# Altium PCB MicrobitQwiic 138.PcbDoc
Units mm, origin at the board's own origin, x right, y up, seen from the top; angles counter-clockwise.
Board outline 17.58 x 16.07 mm, 2 copper layers (Top Layer, Bottom Layer), stack 1.525 mm thick; 6 components, 4 nets, 16 pads, 2 vias.
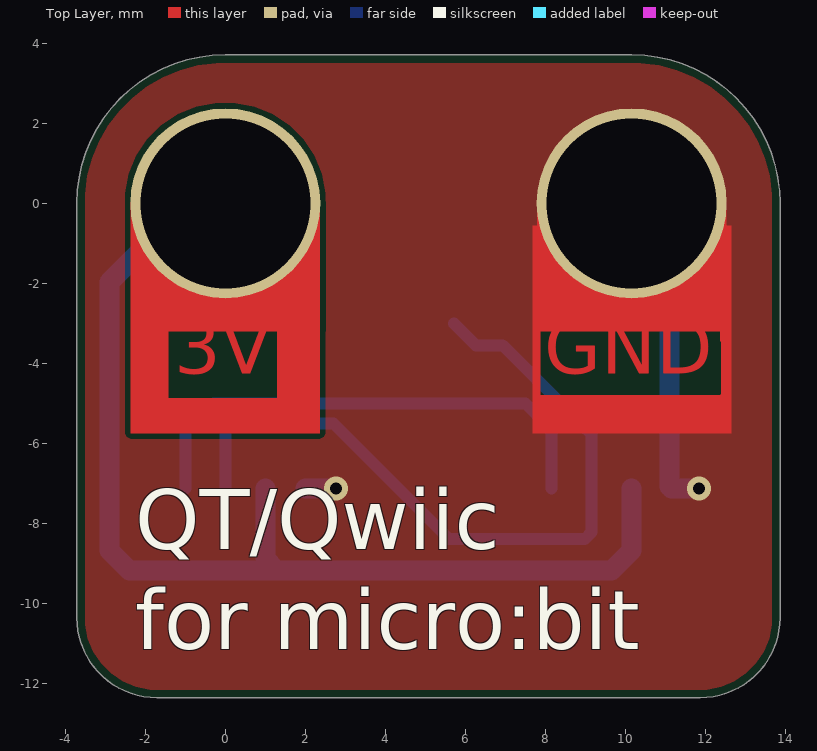
[diagram p0: Top Layer view]
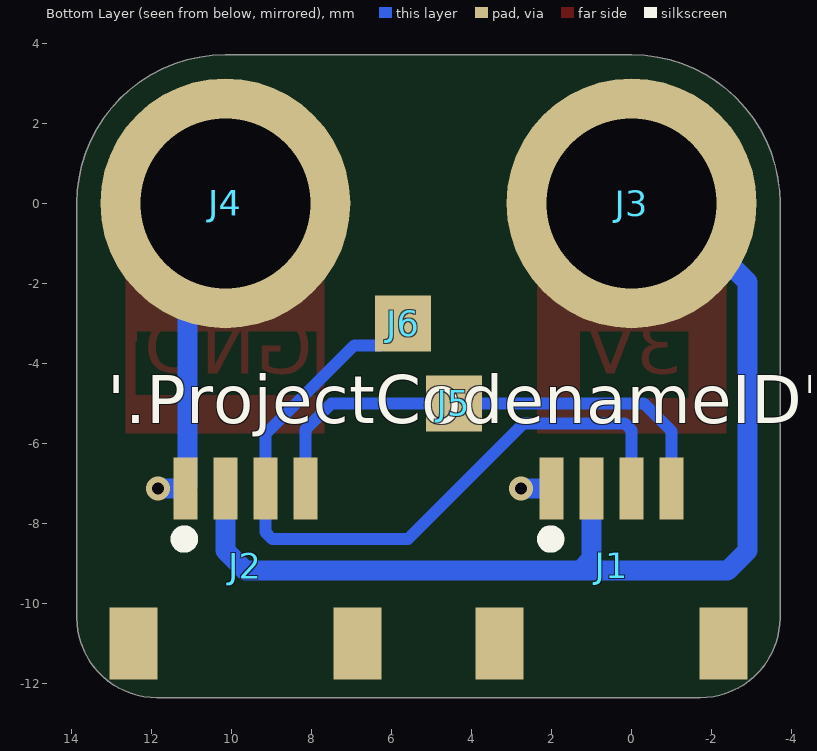
[diagram p1: Bottom Layer view, seen from below]

## Layer stack, top to bottom
Top Solder: solder mask 0.0102, Solder Resist, Dk 3.5
Top Layer: signal copper 0.0356
Dielectric 1: core 1.454, FR-4, Dk 4.2
Bottom Layer: signal copper 0.0356
Bottom Solder: solder mask 0.0102, Solder Resist, Dk 3.5

## Board outline
-3.71,-10.36 ccw(c-1.71,-10.36) -1.71,-12.36 11.87,-12.36 ccw(c11.87,-10.36) 13.87,-10.36 13.87,0 ccw(c10.16,0) 10.16,3.71 0.003,3.71 0,3.71 ccw(c0,0) -3.71,0

## Design rules (kind name [scope] priority, off if disabled: settings)
AssemblyTestPointUsage [All] p1: valid=2
BoardOutlineClearance [All] p1: gap=0.3 ignorepadtopadclearanceinfootprint=FALSE except(0: Arc-OutlineEdge Arc-SplitContinuation Track-OutlineEdge Track-SplitContinuation SMDPad-OutlineEdge SMDPad-SplitContinuation THPad-OutlineEdge THPad-SplitContinuation Via-OutlineEdge Via-SplitContinuation Fill-SplitContinuation Poly-SplitContinuation Region-OutlineEdge Region-SplitContinuation Text-OutlineEdge Text-SplitContinuation; 0.2: Fill-OutlineEdge Poly-OutlineEdge Region-CavityEdge Region-CutoutEdge Region-SplitBarrior Text-CavityEdge Text-CutoutEdge Text-SplitBarrior)
Clearance [All] p1: gap=0.13 ignorepadtopadclearanceinfootprint=FALSE
ComponentClearance MH5.0KeepoutaAreaClearance [InComponent('MH1') or InComponent('MH2')  or InComponent('MH3') or InComponent('MH4') vs InComponent('D6') or InComponent('D7') or InComponent('D8') or InComponent('D9') or InComponent('D10') or InComponent('D11') or InComponent('D12') or InComponent('D13') or InComponent('C6') or InComponent('C7') or InComponent('C8')  or  InComponent('C9') or  InComponent('C12')] p1: gap=0 collisioncheckmode=3 verticalgap=0 showdistances=FALSE
ComponentClearance [All] p2: gap=0.2 collisioncheckmode=3 verticalgap=0.2 showdistances=FALSE
DiffPairsRouting [All] p1: maxlimit=2 minlimit=0.15 mostfreqgap=0.15 toplayer_minwidth=0.15 toplayer_maxwidth=2 toplayer_prefwidth=0.15 bottomlayer_minwidth=0.15 bottomlayer_maxwidth=2 bottomlayer_prefwidth=0.15 maxuncoupledlength=25
FabricationTestPointUsage [All] p1: valid=2 allowmultiple=FALSE
HoleSize [All] p1: absolutevalues=TRUE maxlimit=5 minlimit=0.15 maxpercent=80.000 minpercent=20.000
HoleToHoleClearance [All] p1: gap=0.2 allowstackedmicrovias=TRUE
MinimumSolderMaskSliver [All] p1: minsoldermaskwidth=0.005
PlaneClearance [All] p1: clearance=0.2
PlaneConnect [All] p1: planeconnectstyle=Relief reliefexpansion=0.5 reliefentries=4 reliefconductorwidth=0.2 reliefairgap=0.3
PolygonConnect [All] p1: connectstyle=Direct reliefconductorwidth=0.2 reliefentries=4 polygonreliefangle="90 Angle" airgapwidth=0.2
RoutingVias RoutingVias_Power [InNetClass('Power')] p1: holewidth=0.4 width=0.8 viastyle="Through Hole" minholewidth=0.3 minwidth=0.6 maxholewidth=0.4 maxwidth=1
RoutingVias [All] p2: holewidth=0.3 width=0.6 viastyle="Through Hole" minholewidth=0.3 minwidth=0.6 maxholewidth=0.3 maxwidth=0.8
SilkToSilkClearance [All] p1: silktosilkclearance=0.001
SilkToSolderMaskClearance [IsPad] p1: minsilkscreentomaskgap=0.05 clearancetoexposedcopper=TRUE
SolderMaskExpansion [All] p1: expansion=0.075 istentingtop=FALSE
UnRoutedNet [All] p1: checkbadconnections=TRUE
ViasUnderSMD [not ( HasFootprint('JACDAC_EDGE_CONNECTOR_NO_TRACES') or HasFootprint('JACDAC_EDGE_CONNECTOR_NO_TRACES_CABLE_GUIDE') )] p1: allowed=FALSE
Width Width_Power [InNetClass('Power')] p1: maxlimit=1 minlimit=0.2 preferedwidth=0.5
Width [All] p2: maxlimit=1 minlimit=0.13 preferedwidth=0.13 minimp=50.000000 maximp=50.000000 favimp=50.000000
18 further rules are at their usual default settings.

## Classes and differential pairs
component class "MicrobitQwiic 138": J1 J2 J3 J5 J6

## Components (designator, comment, footprint, x,y, rotation, side; value= is the part's Value field where it differs from the comment)
J1 "SM04B-SRSS-TB(LF)(SN)" SM04B-SRSS-TB(LF)(SN) 0.5,-7.125 r180 bottom
J2 "SM04B-SRSS-TB(LF)(SN)" SM04B-SRSS-TB(LF)(SN) 9.66,-7.125 r180 bottom
J3 "SMTSO-M3-1mm" "smtso M3x1mm" 0,0 r180 bottom
J4 "SMTSO-M3-1mm" "smtso M3x1mm" 10.16,0 r180 bottom
J5 "Pogo" ALPS-SCTA2A0100 4.445,-5 r180 bottom
J6 "Pogo" ALPS-SCTA2A0100 5.715,-3 r180 bottom

## Footprints (in the part's own frame and the unit in brackets; to place one, negate y for a bottom-side part, rotate by r counter-clockwise, add the part's x,y. Pads: shape width x height; smd on the part's side, far side on the other; paste and mask are expansions set on the pad)
ALPS-SCTA2A0100 [mm] "pogo pin 0.8-1.2mm"
  rect 1.4x1.4 smd paste-0.2: 1(0,0)
  body extent -0.7,-0.7 0.7,0.7, height 1.4
SM04B-SRSS-TB(LF)(SN) [mm] "Connector Header Surface Mount, Right Angle 4 position 0.039\" (1.00mm)"
  rect 0.6x1.55 smd: 1(-1.5,0) 2(-0.5,0) 3(0.5,0) 4(1.5,0)
  rect 1.2x1.8 smd: M1(-2.8,-3.875) M2(2.8,-3.875)
  silkscreen extent -1.67,-1.41 -1.38,-1.13, body extent -3,-4.53 3,0.42, height 2.86
"smtso M3x1mm" [mm] "generic M3x1mm SMTSO"
  round 6.25 / inner round 6.25 / far side round 4.75 hole 4.25: 1(0,0)
  body extent -2.77,-2.78 2.77,2.78, height 1

## Part data
J1 J2: "CONN HEADER SMD R/A 4POS 1MM", Color=Natural, Contact Resistance=40mR, Housing Color=Beige, Manufacturer=JST, Max Current Rating=1A, Max Operating Temperature=85°C, Max Voltage Rating (AC)=50V, Min Operating Temperature=-25°C, Supplier Part Number 1=455-1804-1-ND, Category=Connectors, ComponentLink1Description="Online datasheet", ComponentLink1URL=https://datasheet.ciiva.com/26894/getdatasheetpartid-499363-26894945.pdf?src-supplier=Verical, ComponentLink2Description="STEMMA QT info", ComponentLink2URL=https://learn.adafruit.com/introducing-adafruit-stemma-qt/what-is-stemma-qt, ComponentLink3Description="Qwiic info", ComponentLink3URL=https://www.sparkfun.com/qwiic, Connector Type="Male Pin", Contact Material="Copper Alloy", Contact Plating=Tin,Copper, Depth=4.95mm, Housing Material=Polyamide, Lead Free="Lead Free", Length=6mm, Manufacturer 1=JST, Manufacturer Part Number=SM04B-SRSS-TB(LF)(SN), Manufacturer Part Number 1=SM04B-SRSS-TB(LF)(SN), Max Voltage Rating (DC)=50V, Mount="Surface Mount", Number of Contacts=4, Number of Positions=4, Number of Rows=1, Orientation="Right Angle", Packaging="Tape and Reel", Pitch=0.039inch, RoHS=Yes, Supplier 1=Digi-Key, Supplier 2=Farnell, Supplier 3="Future Electronics", Supplier 4=Newark, Supplier Part Number 2=1830839, Supplier Part Number 3=4517173, Supplier Part Number 4=87R0314, Termination=Solder
J3 J4: Supplier Part Number 1=C2916331, Diameter=M3, Standoff Height=1mm, Supplier 1=LCSC
J5 J6: library part SCTA2A0100, "PCB 3A Spring contct SMT 1.4x1.4x1.2mm, working height 0.8-1.2mm", Manufacturer="Alps Electric", Supplier Part Number 1=3261853, Category=Connectors, ComponentLink3Description="Alps webpage", ComponentLink3URL=https://tech.alpsalpine.com/e/products/detail/SCTA2A0100/, Manufacturer 1="Alps Electric", Manufacturer Part Number=SCTA2A0100, Manufacturer Part Number 1=SCTA2A0100, Pricing 1="10=0.12200, 50=0.10400, 100=0.10100, 500=0.07680 (GBP)", RoHS=No, Stock 1=6260, Supplier 1=Farnell, Supplier 2=Mouser, Supplier 3=LCSC, Supplier Part Number 2=688-SCTA2A0100, Supplier Part Number 3=C351180, Working Height=1.0mm

## Via types
v1: diameter 0.6, hole 0.3, Top Layer to Bottom Layer, tented both sides, 2 vias

## Nets (pads, with @x,y where several pads share a name; then routed paths per layer and width w, separated by ;. In a path a pad name is that pad's centre, name@x,y a point inside that pad or via, vN(x,y) a via of type N, cw(c..) or ccw(c..) an arc to the next point about the centre after c; other vN are vias at no path point)
GND: J1.1 J2.1 J4.1 | length 9
  Bottom Layer w0.5: J1.1 v1(2.768,-7.125) ; J4.1 11.11,-0.95 11.11,-7.075 J2.1 v1(11.839,-7.125)
SCL: J1.4 J2.4 J5.1 | length 12.6
  Bottom Layer w0.3: J1.4 -1,-5.7 -0.3,-5 J5.1 7.5,-5 8.16,-5.66 J2.4
SDA: J1.3 J2.3 J6.1 | length 19
  Bottom Layer w0.3: J1.3 0,-5.676 0.176,-5.5 2.7,-5.5 5.595,-8.395 8.984,-8.395 9.16,-8.219 J2.3 9.16,-5.777 6.933,-3.55 6.265,-3.55 J6.1
VREG: J1.2 J2.2 J3.1 | length 27.6
  Bottom Layer w0.5: J3.1 -0.928,0 -2.9,-1.972 -2.9,-8.68 -2.4,-9.18 1.293,-9.18 ; J1.2 1,-8.887 1.293,-9.18 ; J2.2 10.16,-8.68 9.66,-9.18 1.293,-9.18
pads on no net: J1.M1 J1.M2 J2.M1 J2.M2

## Polygon pours and split planes (outlines as drawn)
GND on Top Layer "NONET_L-01_P-001" (solid, pour order 0): -3.71,-10.36 ccw(c-1.71,-10.36) -1.71,-12.36 11.87,-12.36 ccw(c11.87,-10.36) 13.87,-10.36 13.87,0 ccw(c10.16,0) 10.16,3.71 0.003,3.71 0,3.71 ccw(c0,0) -3.71,0

## Other copper
Top Layer:
  region net GND: 7.795,0.036 7.795,-3.2 12.528,-3.2 12.528,0.036
  region net VREG: -2.365,0.036 -2.365,-3.2 2.368,-3.2 2.368,0.036
  region net GND: 7.684,-5.754 10.125,-5.754 12.65,-5.754 12.65,-0.564 12.37,-0.564 12.37,-3.441 12.404,-3.475 12.404,-4.76 12.37,-4.794 7.87,-4.794 7.87,-0.564 7.684,-0.564
  region net VREG: -2.365,-5.744 -0.23,-5.744 2.365,-5.744 2.365,-0.564 1.295,-0.564 1.295,-4.869 -1.43,-4.869 -1.43,-0.564 -2.365,-0.564
  text "3V" at -1.281,-4.7 h2.3
  text "GND" at 7.97,-4.7 h2.3

## Silkscreen, mask and mechanical layers (free items; w line width, h text height)
Top Overlay:
  text "QT/Qwiic" at -2.25,-8.65 h1.5
  text "for micro:bit" at -2.25,-11.15 h1.5
Bottom Overlay:
  text "'.ProjectCodenameID'-'.ProjectRevision'" at 13.116,-5.5 h1.2
Top Solder:
  region: 7.684,0 7.684,-3.2 12.585,-3.2 12.585,0
  region: -2.39,-0.064 -2.39,-3.2 2.248,-3.2 2.248,-0.064
  region: -2.413,-5.802 2.428,-5.802 2.428,0 1.285,0 1.285,-4.877 -1.408,-4.877 -1.408,0 -2.413,0
  region: 7.684,-5.827 12.616,-5.827 12.616,-0.889 12.285,-0.889 12.285,-2.803 12.382,-2.9 12.382,-4.612 12.193,-4.8 7.91,-4.8 7.91,-0.889 7.684,-0.889
  text "3V" at -1.281,-4.7 h2.3
  text "GND" at 7.97,-4.7 h2.3
Alignment:
  lines w0.1: 0,-6.86 10.16,-6.86
Board Outline:
  lines w0.1: 0,3.71 ccw(c0,0) -3.71,0 -3.71,-10.36 ccw(c-1.71,-10.36) -1.71,-12.36 11.87,-12.36 ccw(c11.87,-10.36) 13.87,-10.36 13.87,0 ccw(c10.16,0) 10.16,3.71 0.003,3.71